# Altium PCB e3_tp2_ej2.PcbDoc
Units mm, origin at the board's own origin, x right, y up, seen from the top; angles counter-clockwise.
Board outline 50.04 x 50.04 mm, 2 copper layers (Top Layer, Bottom Layer); 11 components, 9 nets, 58 pads, 0 vias.
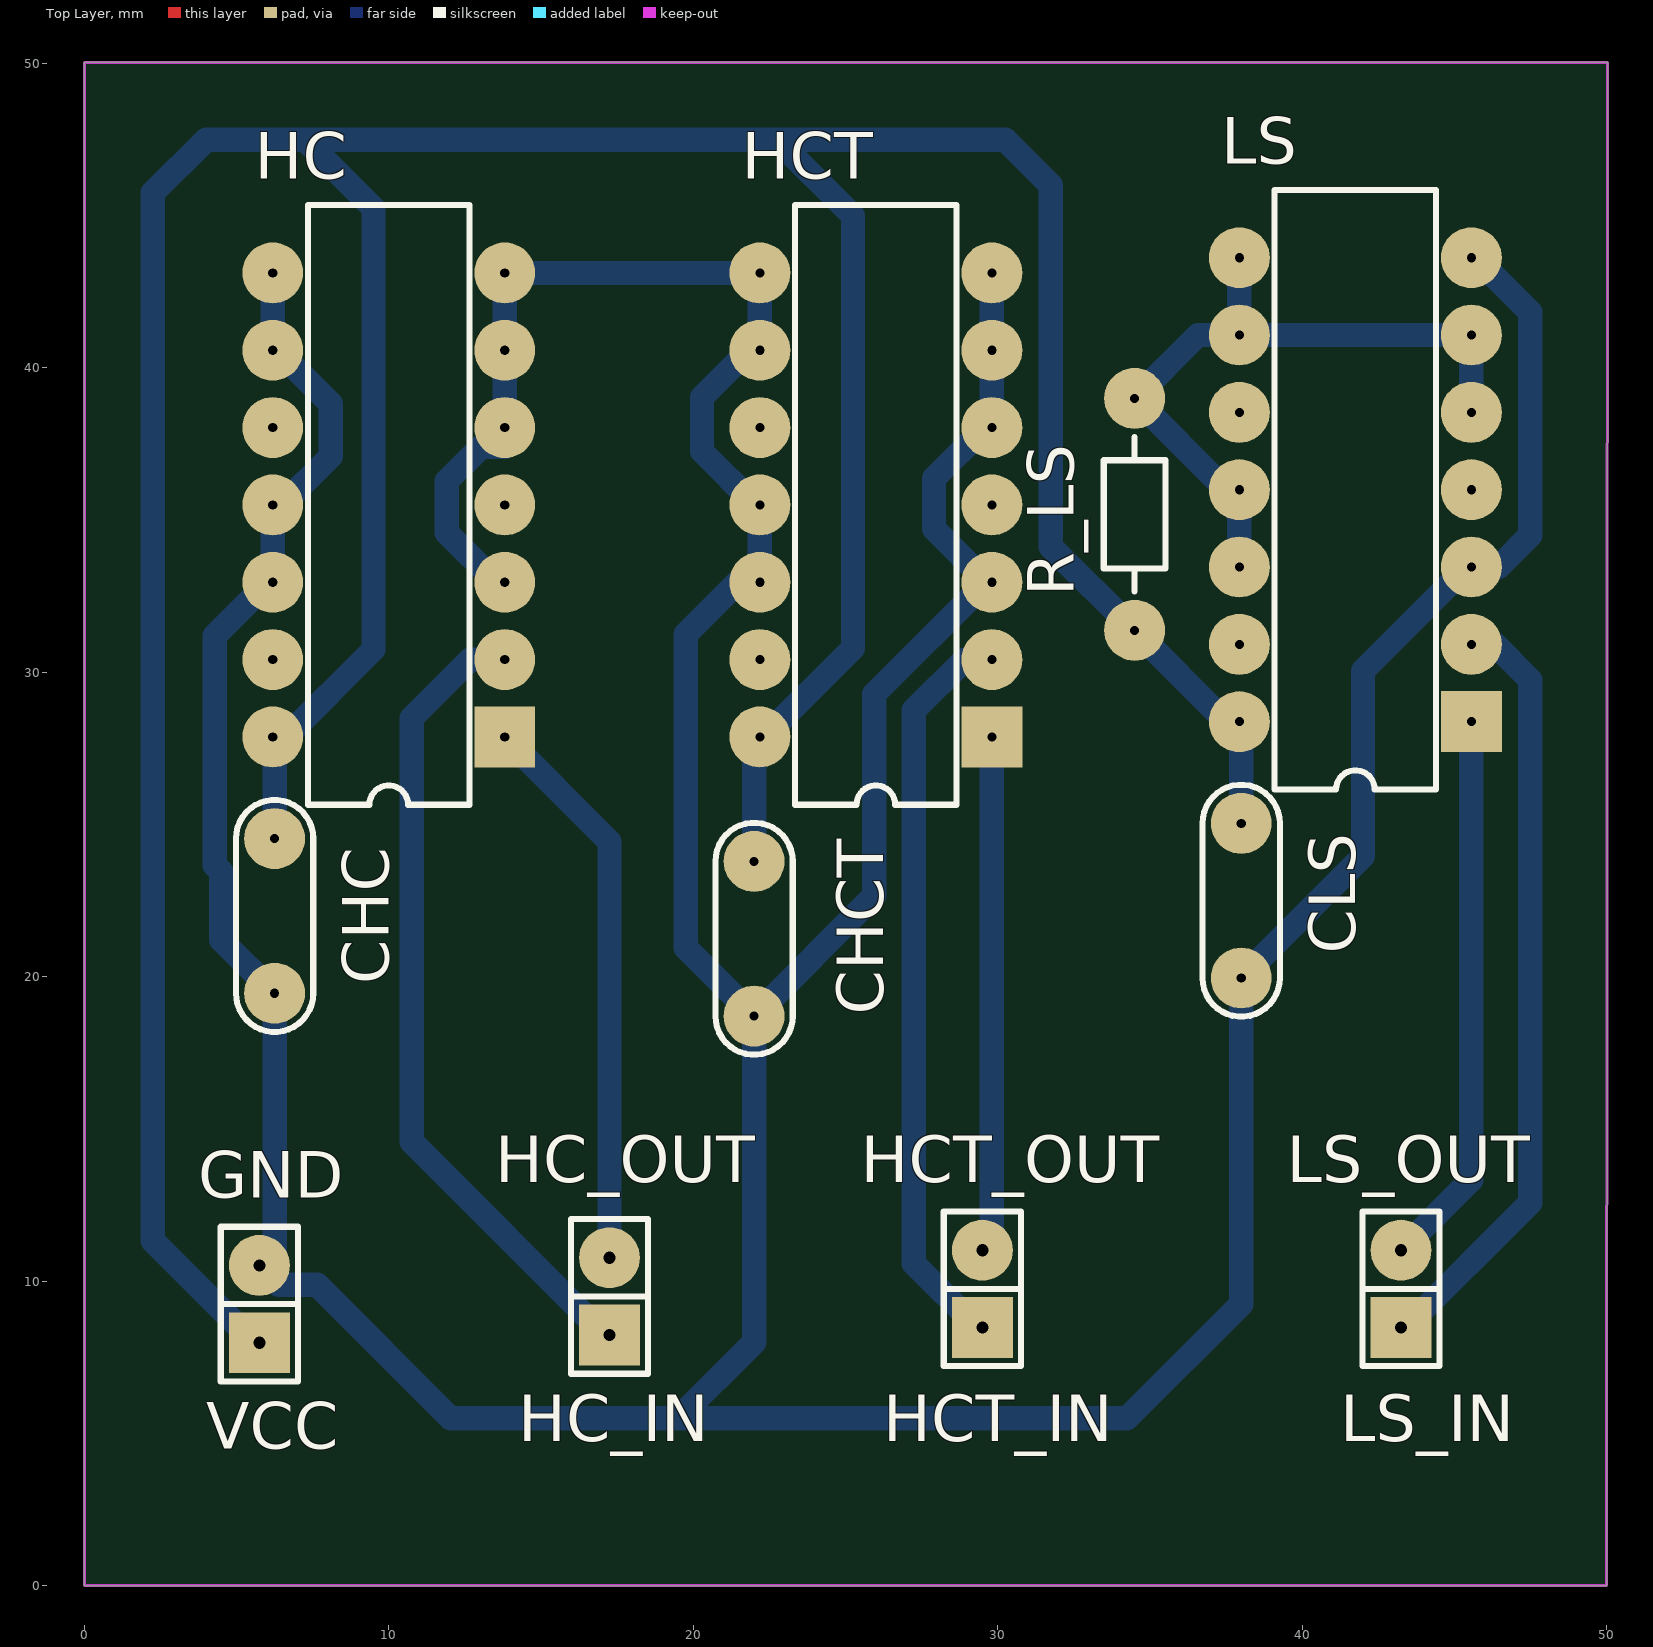
[diagram p0: Top Layer view]
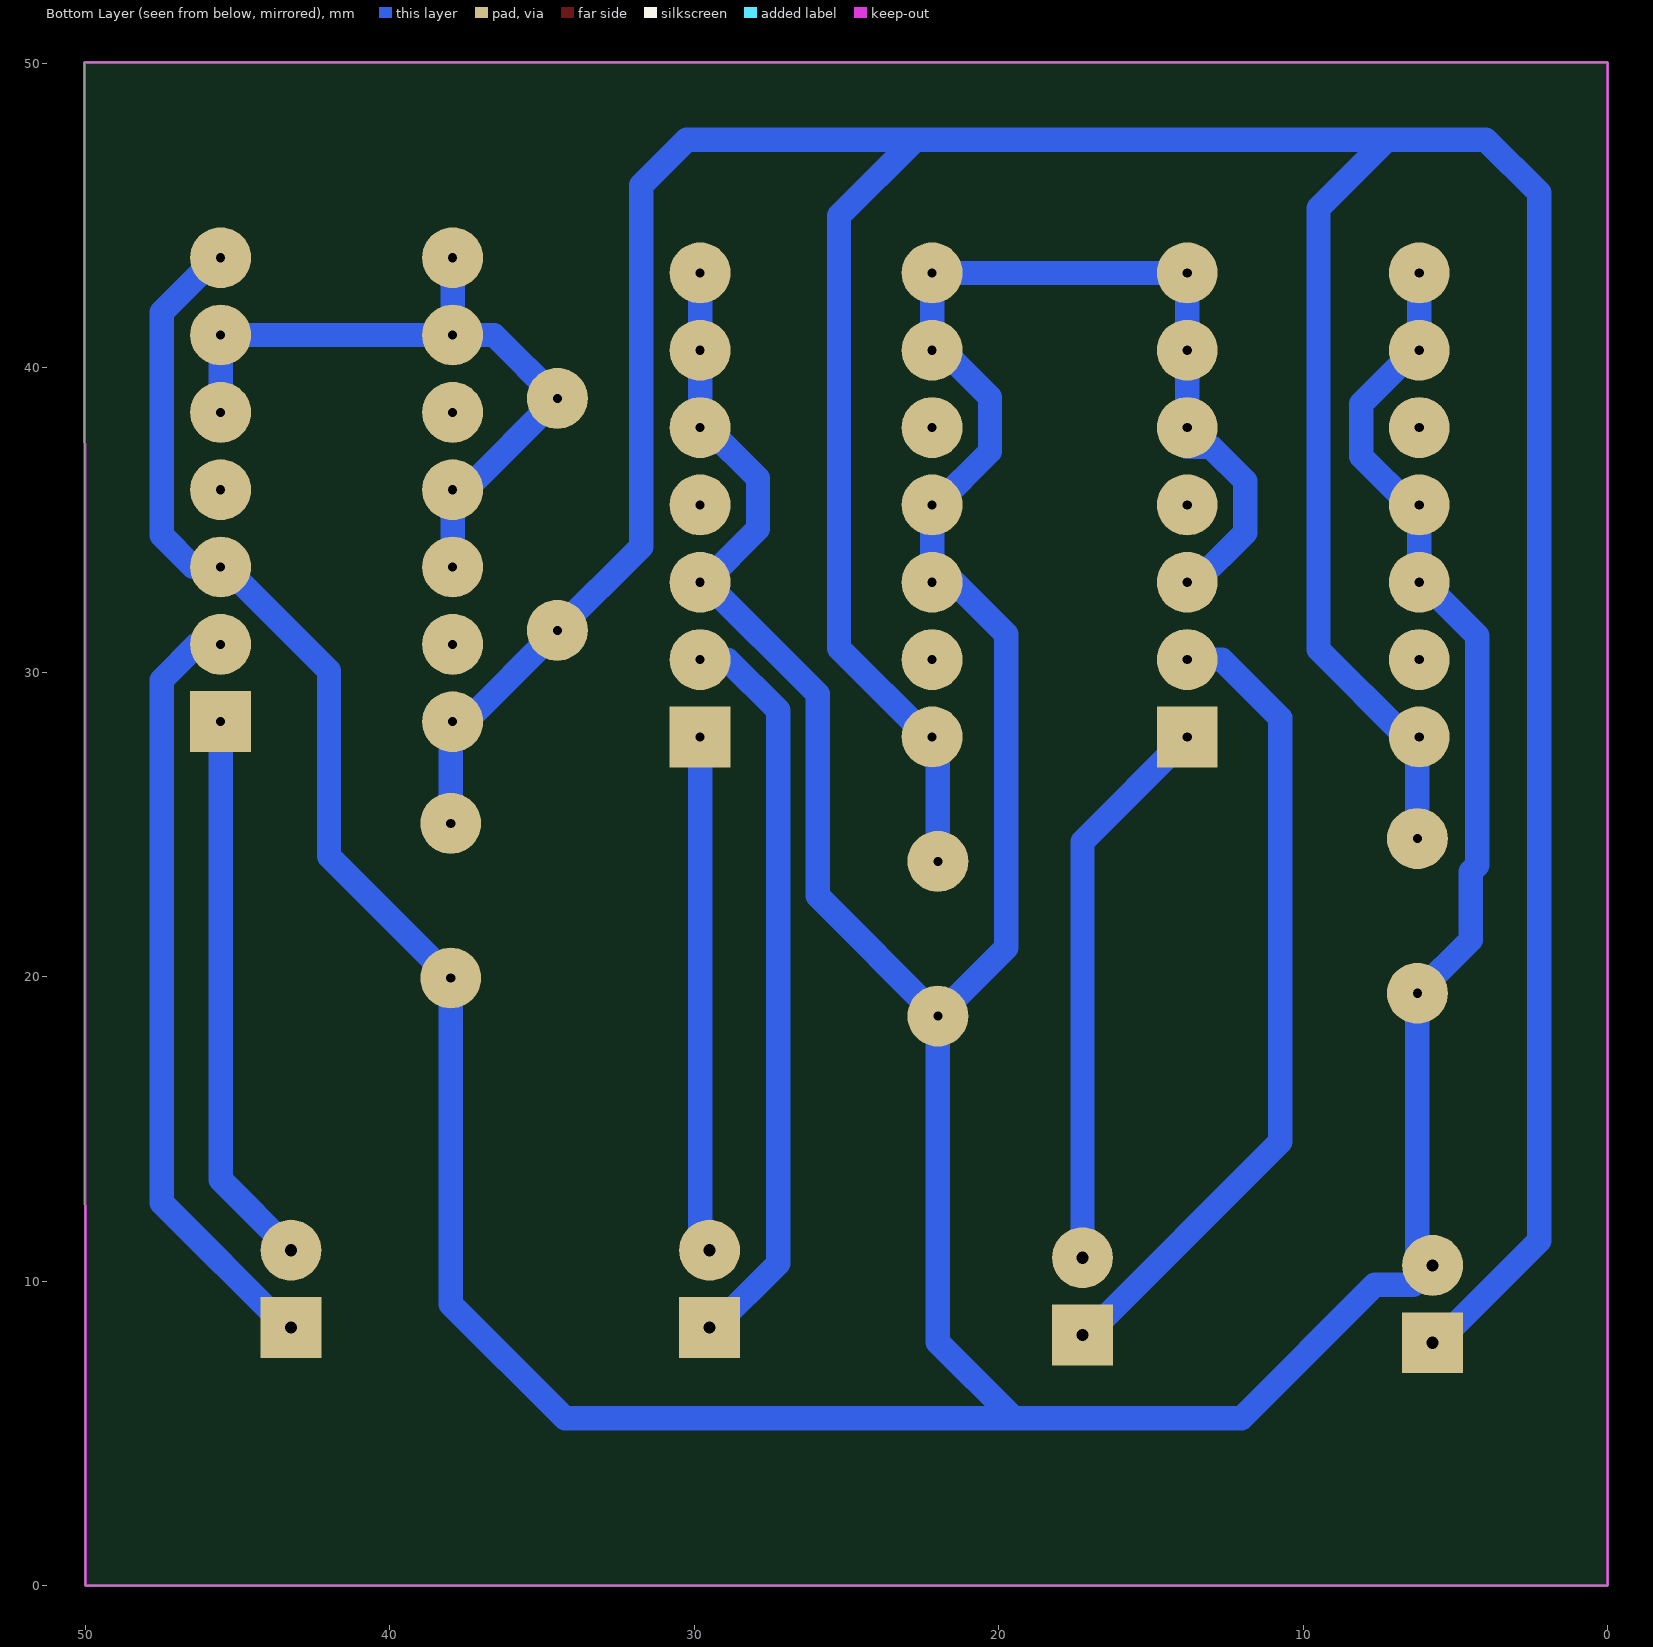
[diagram p1: Bottom Layer view, seen from below]

## Layer stack, top to bottom
Top Solder: solder mask 0.0102, Solder Resist, Dk 3.5
Top Layer: signal copper 0.0356
Dielectric 1: dielectric 0.32, FR-4, Dk 4.8
Bottom Layer: signal copper 0.0356
Bottom Solder: solder mask 0.0102, Solder Resist, Dk 3.5

## Board outline
50.038,50.038 0,50.038 0,0 50,0

## Design rules (kind name [scope] priority, off if disabled: settings)
Clearance [All] p1: gap=0.5 ignorepadtopadclearanceinfootprint=FALSE
PolygonConnect [All] p1: connectstyle=Relief reliefconductorwidth=0.254 reliefentries=4 polygonreliefangle="90 Angle" airgapwidth=0.254
RoutingVias [All] p1: holewidth=0.711 width=1.27 viastyle="Through Hole" minholewidth=0.711 minwidth=1.27 maxholewidth=0.711 maxwidth=1.27
SolderMaskExpansion [All] p1: expansion=0.102
Width [All] p1: maxlimit=0.8 minlimit=0.8 preferedwidth=0.8
30 further rules are at their usual default settings.

## Components (designator, comment, footprint, x,y, rotation, side; value= is the part's Value field where it differs from the comment)
CHC "CAP" CAP200 6.25,22 r270 top
CHCT "CAP" CAP200 22,21.25 r270 top
CLS "CAP" CAP200 38,22.5 r270 top
HC "SN74AHC02N" N014 10,35.5 r90 top
HC_IN "CON2" SIP2 17.25,9.5 r90 top (schematic designator INOUT_HC)
HCT "SN74AHCT02N" N014 26,35.5 r90 top
HCT_OUT "CON2" SIP2 29.5,9.75 r90 top (schematic designator INOUT_HCT)
LS "SN74ALS02N" N014 41.75,36 r90 top
LS_OUT "CON2" SIP2 43.25,9.75 r90 top (schematic designator INOUT_LS)
R_LS "RES" RES300 34.5,39 r270 top
VCC "*" SIP2 5.75,9.25 r90 top (schematic designator ALIMENTACION)

## Footprints (in the part's own frame and the unit in brackets; to place one, negate y for a bottom-side part, rotate by r counter-clockwise, add the part's x,y. Pads: shape width x height; smd on the part's side, far side on the other; paste and mask are expansions set on the pad)
CAP200 [mm]
  round 2 hole 0.3: 1(-2.54,0) 2(2.54,0)
  silkscreen extent -3.81,-1.27 3.81,1.27, body extent -2.79,-1.17 2.79,1.12, height 6.24
N014 [mm] "DIP; 14 Leads; Row Spacing 7.62 mm; Pitch 2.54 mm"
  rect 2x2 hole 0.3: 1(-7.62,-3.81)
  round 2 hole 0.3: 2(-5.08,-3.81) 3(-2.54,-3.81) 4(0,-3.81) 5(2.54,-3.81) 6(5.08,-3.81) 7(7.62,-3.81) 8(7.62,3.81) 9(5.08,3.81) 10(2.54,3.81) 11(0,3.81) 12(-2.54,3.81) 13(-5.08,3.81) 14(-7.62,3.81)
  silkscreen extent -9.85,-2.65 9.85,2.65
RES300 [mm]
  round 2 hole 0.3: 1(0,0) 2(7.62,0)
  silkscreen extent 1.27,-1.02 6.35,1.02, body extent -0.25,-0.97 7.87,0.97, height 2.01
SIP2 [mm]
  rect 2x2 hole 0.4 unplated: 1(-1.27,0)
  round 2 hole 0.4 unplated: 2(1.27,0)
  silkscreen extent -2.54,-1.27 2.54,1.27

## Part data
HC HCT LS: "Quadruple 2-Input Positive-NOR Gate", ComponentLink1Description="Manufacturer Link", ComponentLink1URL=http://www.ti.com/, LatestRevisionDate=04-Mar-2005, LatestRevisionNote="Stylized 3D Model Added.", PackageDescription="DIP; 14 Leads; Row Spacing 7.62 mm; Pitch 2.54 mm", PackageReference=N014, PackageVersion=Oct-1995, Published=8-Jun-2000, Publisher="Altium Limited"
  HC: ComponentLink2Description=Datasheet, ComponentLink2URL=http://www-s.ti.com/sc/ds/sn74ahc02.pdf, ComponentLink3Description="Packaging Specification", ComponentLink3URL=http://focus.ti.com/lit/ml/mpdi002c/mpdi002c.pdf, DatasheetVersion=Apr-1999
  HCT: ComponentLink2Description=Datasheet, ComponentLink2URL=http://www-s.ti.com/sc/ds/sn74ahct02.pdf, ComponentLink3Description="Packaging Specification", ComponentLink3URL=http://focus.ti.com/lit/ml/mpdi002c/mpdi002c.pdf, DatasheetVersion=Apr-1999
  LS: ComponentLink2Description="Packaging Specification", ComponentLink2URL=http://focus.ti.com/lit/ml/mpdi002c/mpdi002c.pdf, DatasheetVersion=Jan-1994
VCC: library part CON2

## Nets (pads, with @x,y where several pads share a name; then routed paths per layer and width w, separated by ;. In a path a pad name is that pad's centre, name@x,y a point inside that pad or via, vN(x,y) a via of type N, cw(c..) or ccw(c..) an arc to the next point about the centre after c; other vN are vias at no path point)
GND: CHC.2 CHCT.2 CLS.2 HC.3 HC.5 HC.6 HC.7 HC.8 HC.9 HC.11 HC.12 HCT.3 HCT.5 HCT.6 HCT.7 HCT.8 HCT.9 HCT.11 HCT.12 LS.3 LS.7 VCC.2 | length 205.2
  Bottom Layer w0.8: HC.8 HC.9 6.337,40.58 8.09,38.827 8.09,37.09 6.5,35.5 HC.11 HC.12 6.043,32.96 4.29,31.207 4.29,23.663 4.5,23.453 4.5,21.21 CHC.2 6.25,11.02 VCC.2 6.39,9.88 7.65,9.88 12.03,5.5 19.5,5.5 ; HC.3 13.54,32.96 11.91,34.59 11.91,36.287 13.023,37.4 13.81,37.4 HC.5 HC.6 HC.7 HCT.8 HCT.9 21.833,40.58 20.29,39.037 20.29,37.253 22.043,35.5 HCT.11 HCT.12 21.46,32.96 19.75,31.25 19.75,20.96 CHCT.2 ; HCT.7 HCT.6 HCT.5 29.573,38.04 27.91,36.377 27.91,34.713 HCT.3@29.663,32.96 ; HCT.3@29.957,32.96 HCT.3 HCT.3@29.663,32.96 ; LS.7 45.707,43.62 47.5,41.827 47.5,34.5 46.46,33.46 LS.3 45.413,33.46 42,30.047 42,23.96 CLS.2 38,9.25 34.25,5.5 19.5,5.5 ; 19.5,5.5 22,8 CHCT.2 ; CHCT.2 25.95,22.66 25.95,29.288 29.622,32.96 HCT.3@29.663,32.96
NetHC_1: HC.1 HC_IN.2 | length 18.5
  Bottom Layer w0.8: HC.1 17.25,24.44 HC_IN.2
NetHC_2: HC.2 HC_IN.1 | length 26.9
  Bottom Layer w0.8: HC.2 12.67,30.42 10.75,28.5 10.75,14.583 17.103,8.23 HC_IN.1
NetHCT_1: HCT.1 HCT_OUT.2 | length 17
  Bottom Layer w0.8: HCT_OUT.2 29.81,11.33 HCT.1
NetHCT_2: HCT.2 HCT_OUT.1 | length 24.5
  Bottom Layer w0.8: HCT_OUT.1 29.353,8.48 27.25,10.583 27.25,28.75 28.92,30.42 HCT.2
NetINOUT_LS_1: LS.2 LS_OUT.1 | length 25.5
  Bottom Layer w0.8: LS_OUT.1 43.397,8.48 47.5,12.583 47.5,29.75 46.33,30.92 LS.2
NetINOUT_LS_2: LS.1 LS_OUT.2 | length 18.3
  Bottom Layer w0.8: LS_OUT.2 45.56,13.33 LS.1
NetLS_5: LS.5 LS.6 LS.8 LS.9 LS.11 LS.12 R_LS.1 | length 24.2
  Bottom Layer w0.8: LS.12 LS.11 37.5,36 R_LS.1 36.58,41.08 LS.9 ; LS.8 LS.9 ; LS.5 LS.6 LS.9
VCC: CHC.1 CHCT.1 CLS.1 HC.14 HCT.14 LS.14 R_LS.2 VCC.1 | length 146.2
  Top Layer w0.8: VCC.1 VCC.1@6.19,7.98 ; HC.14 HC.14@6.25,27.82
  Bottom Layer w0.8: VCC.1 5.603,7.98 2.25,11.333 2.25,45.75 4,47.5 7.25,47.5 ; CHC.1 6.25,27.82 HC.14 6.63,27.88 9.5,30.75 9.5,45.25 7.25,47.5 ; CHCT.1 22,27.69 HCT.14 22.337,27.88 25.25,30.793 25.25,45 22.75,47.5 ; CLS.1 38,28.32 LS.14 37.5,28.38 R_LS.2 31.75,34.13 31.75,46 30.25,47.5 22.75,47.5 ; 7.25,47.5 22.75,47.5
pads on no net: HC.4 HC.10 HC.13 HCT.4 HCT.10 HCT.13 LS.4 LS.10 LS.13

## Keep-outs
Keep-Out Layer:
  the board outline again, w0.1

## Silkscreen, mask and mechanical layers (free items; w line width, h text height)
Top Overlay:
  text "HC_OUT" at 13.5,13.25 h1.52
  text "GND" at 3.75,12.75 h1.52
  text "HCT_IN" at 26.25,4.75 h1.52
  text "LS_IN" at 41.25,4.75 h1.52